# Altium PCB PCB9.PcbDoc
Units mil, origin at the board's own origin, x right, y up, seen from the top; angles counter-clockwise.
Board outline 6000 x 4000 mil, 2 copper layers (Top Layer, Bottom Layer); 11 components, 11 nets, 67 pads, 0 vias.
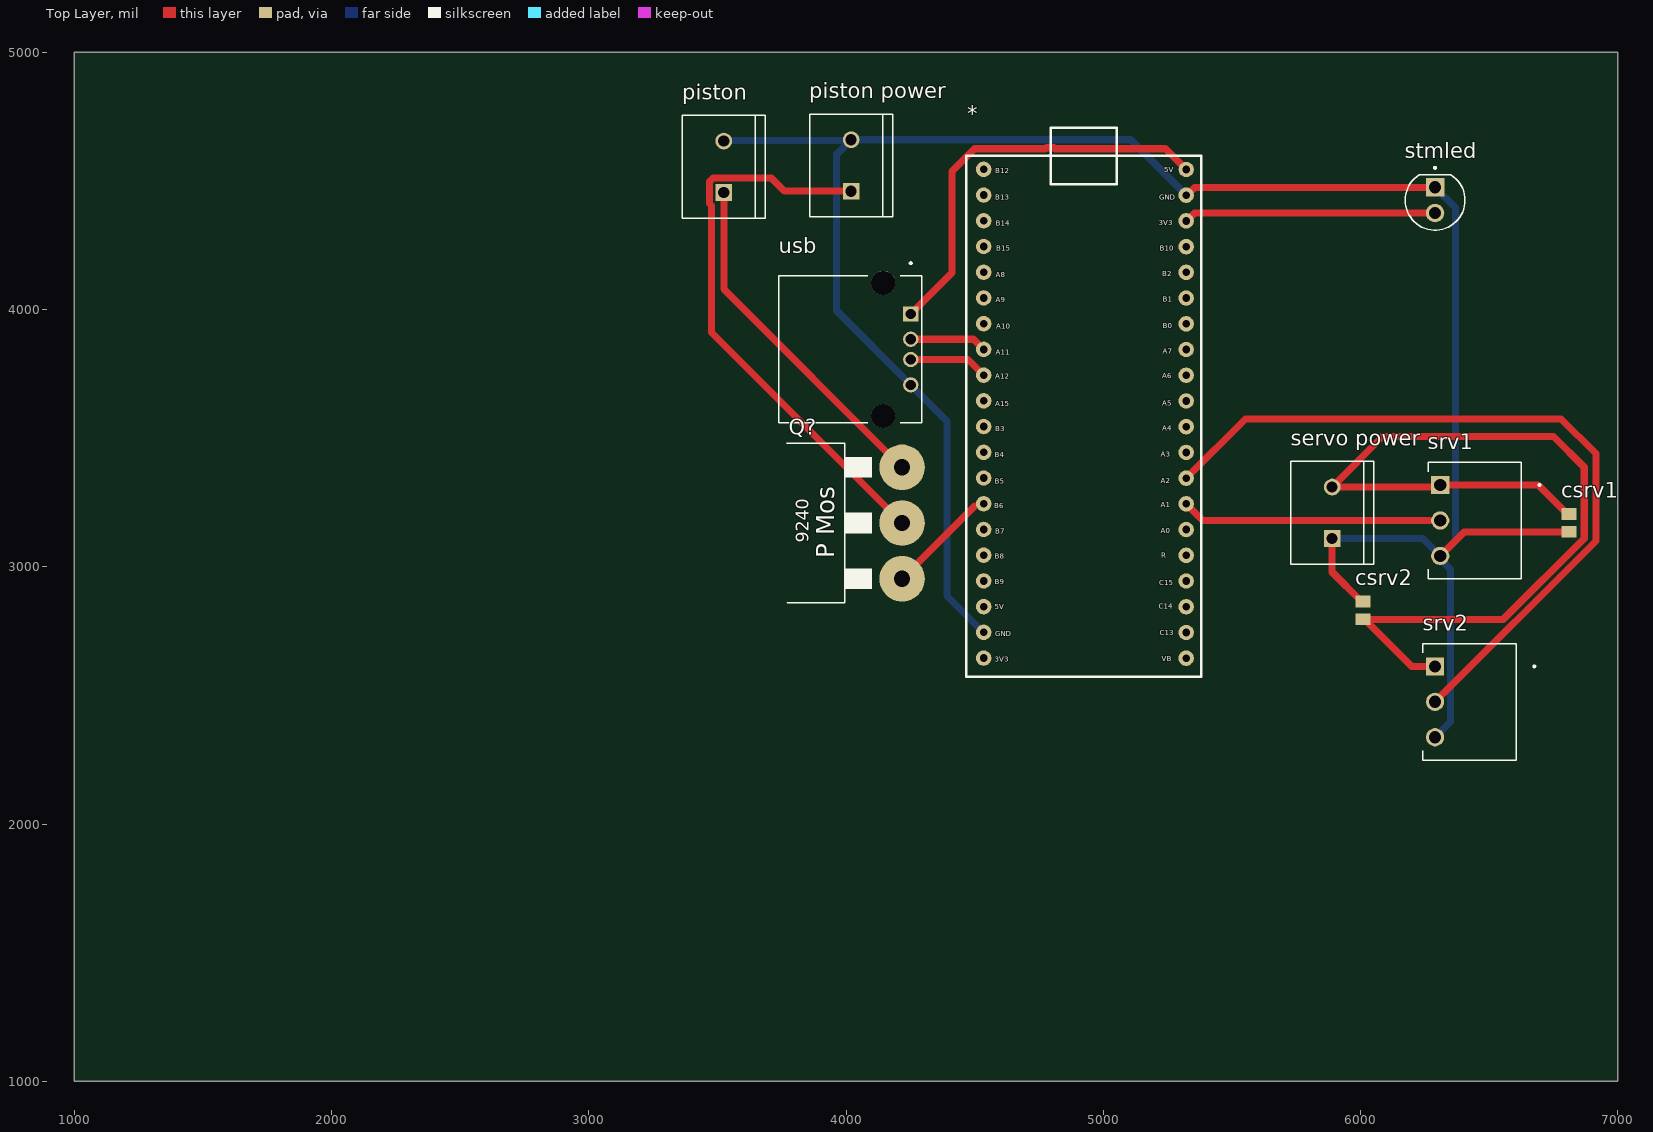
[diagram p0: Top Layer view]
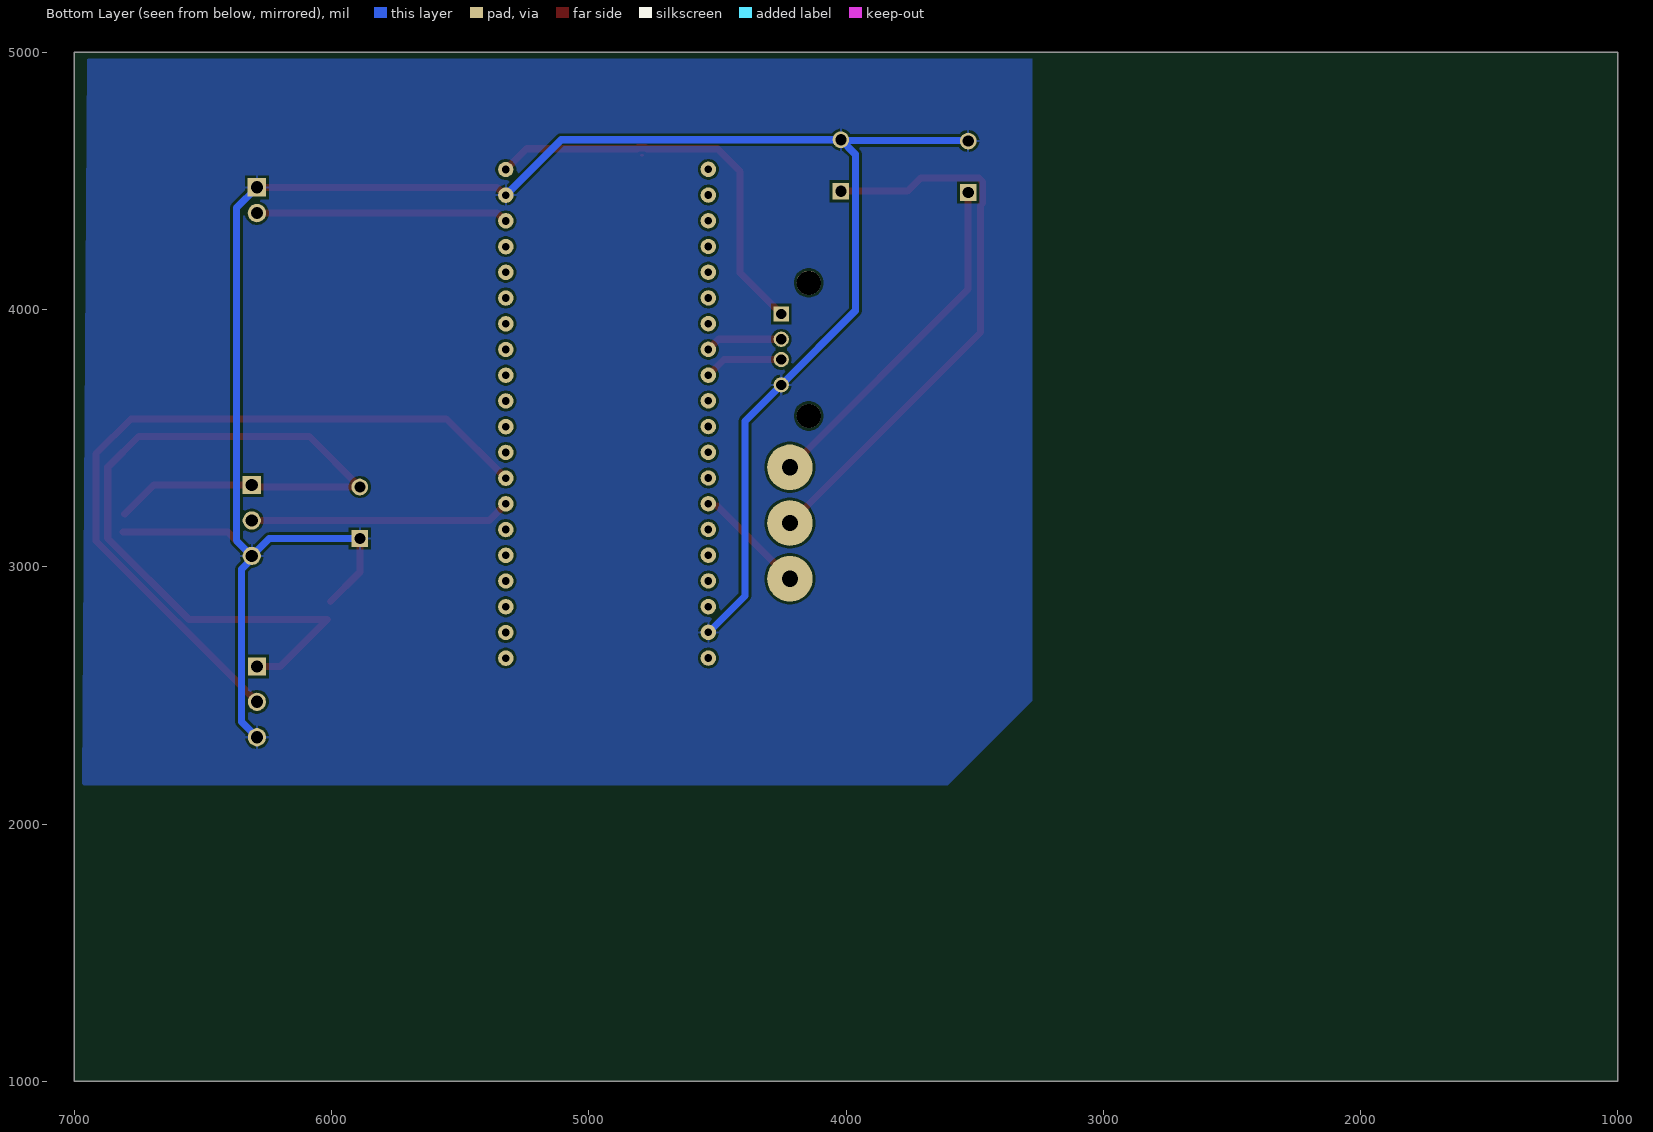
[diagram p1: Bottom Layer view, seen from below]
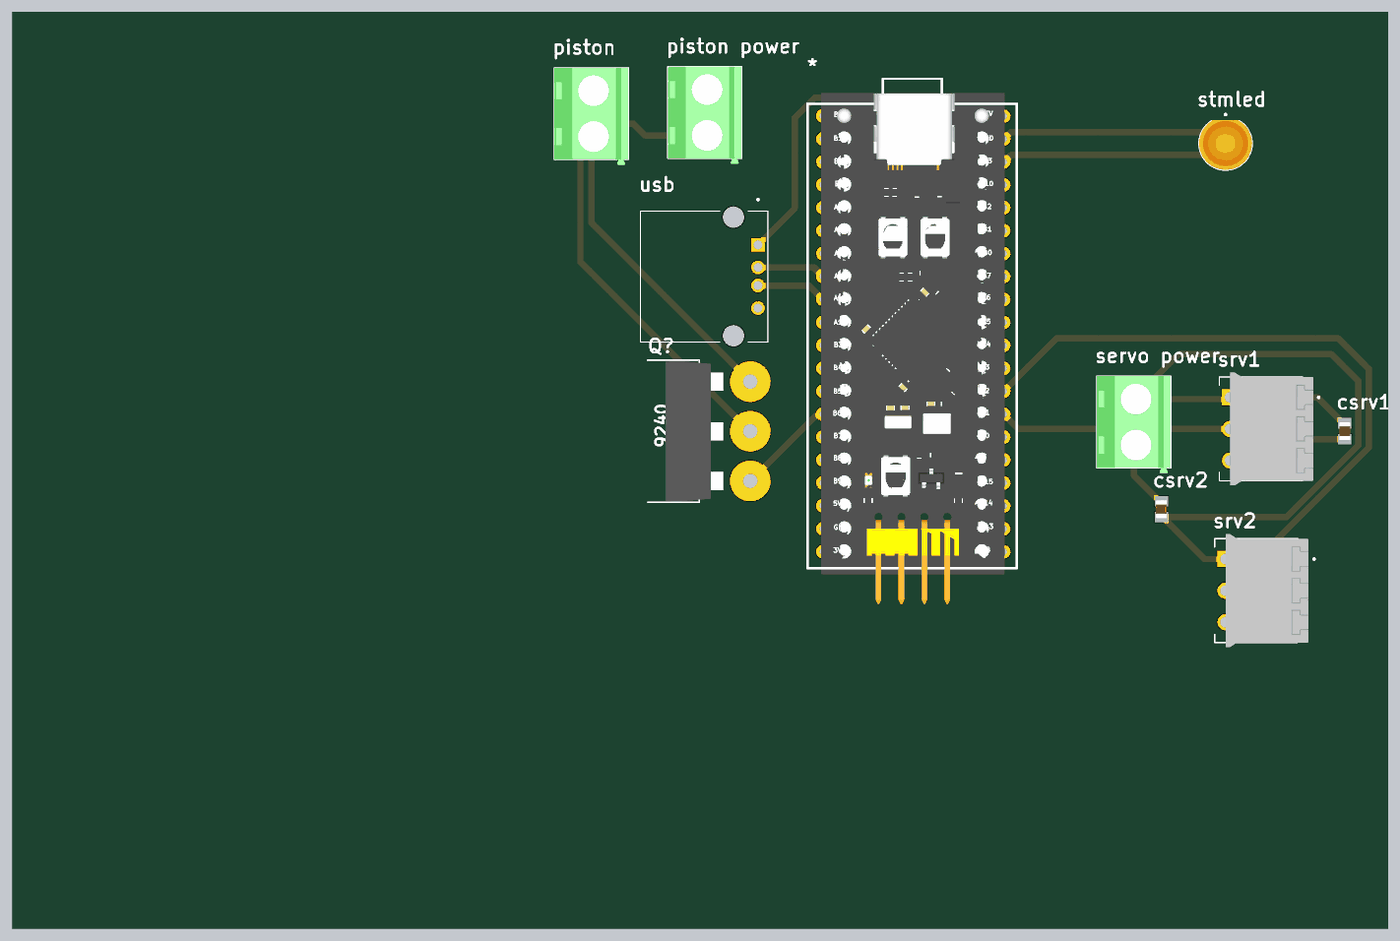
[diagram p2: 3D render of the assembled board from above, using the file's embedded part models]

## Layer stack, top to bottom
Top Solder: solder mask 0.4, Solder Resist, Dk 3.5
Top Layer: signal copper 1.4
Dielectric 1: dielectric 12.6, FR-4, Dk 4.8
Bottom Layer: signal copper 1.4
Bottom Solder: solder mask 0.4, Solder Resist, Dk 3.5

## Board outline
1000,1000 7000,1000 7000,5000 1000,5000

## Design rules (kind name [scope] priority, off if disabled: settings)
Clearance [All] p1: gap=10 ignorepadtopadclearanceinfootprint=FALSE
PolygonConnect [All] p1: connectstyle=Relief reliefconductorwidth=10 reliefentries=4 polygonreliefangle="90 Angle" airgapwidth=10
RoutingVias [All] p1: holewidth=28 width=50 viastyle="Through Hole" minholewidth=28 minwidth=50 maxholewidth=28 maxwidth=50
SolderMaskExpansion [All] p1: expansion=4 istentingtop=FALSE
SupplyNets "Schematic Supply Nets" [InNet('GND')] p1: voltage=0.000
Width [All] p1: maxlimit=393.7 minlimit=10 preferedwidth=27.56
30 further rules are at their usual default settings.

## Components (designator, comment, footprint, x,y, rotation, side; value= is the part's Value field where it differs from the comment)
* "STM32 BLACK PILL" "STM 32 Black Pill" 4535.28,4544.38 r0 top
csrv1 "CGA4J1X7S1E106K125AE" CAPC2012X150N 6810,3170.35 r270 top
csrv2 "CGA4J1X7S1E106K125AE" CAPC2012X150N 6010,2830.35 r90 top
piston "282837-2" TE_282837-2 3525,4555 r90 top
"piston power" "282837-2" TE_282837-2 4020,4560 r90 top
Q? "IRFP9240" TO-247_XA.AMP.P 3955,3170 r90 top
"servo power" "282837-2" TE_282837-2 5890,3210 r90 top
srv1 "284512-3" TE_284512-3 6310,3180 r270 top
srv2 "284512-3" TE_284512-3 6290,2475 r270 top
stmled "L08R5000Q1" LEDRD254W57D500H1070 6290,4425 r270 top
usb "USB-A1HSW6" OST_USB-A1HSW6 4145,3845 r270 top

## Footprints (in the part's own frame and the unit in brackets; to place one, negate y for a bottom-side part, rotate by r counter-clockwise, add the part's x,y. Pads: shape width x height; smd on the part's side, far side on the other; paste and mask are expansions set on the pad)
CAPC2012X150N [mm]
  rect 1.15x1.47 smd: 1(-0.88,0) 2(0.88,0)
  body extent -1,-0.63 1,0.63, height 1.5
LEDRD254W57D500H1070 [mm]
  round 1.815 hole 1.21: A(1.27,0)
  rect 1.815x1.815 / inner round 1.815 / far side rect 1.815x1.815 hole 1.21: C(-1.27,0)
  silkscreen extent -3.3,-2.96 2.96,2.96, body extent -2.6,-2.95 2.95,2.95, height 9.1
OST_USB-A1HSW6 [mm]
  rect 1.508x1.508 / inner round 1.508 / far side rect 1.508x1.508 hole 1: 1(-3.5,2.71)
  round 1.508 hole 1: 2(-1,2.71) 3(1,2.71) 4(3.5,2.71)
  round 2.38 hole 2.38 unplated: ""(-6.57,0) ""(6.57,0)
  silkscreen extent -8.61,-10.3 7.25,3.8
"STM 32 Black Pill" [mil]
  round 60 hole 30: 1(787.4,0) 2(787.2,-99.8) 3(787.2,-199.8) 4(787.2,-299.8) 5(787.2,-399.8) 6(787.2,-499.8) 7(787.2,-599.8) 8(787.2,-699.8) 9(787.2,-799.8) 10(787.2,-899.8) 11(787.2,-999.8) 12(787.2,-1099.8) 13(787.2,-1199.8) 14(787.2,-1299.8) 15(787.2,-1399.8) 16(787.2,-1499.8) 17(787.2,-1599.8) 18(787.2,-1699.8) 19(787.2,-1799.8) 20(787.2,-1899.8) 21(-0.28,0.62) 22(-0.28,-99.38) 23(-0.28,-199.38) 24(-0.28,-299.38) 25(-0.28,-399.38) 26(-0.28,-499.38) 27(-0.28,-599.38) 28(-0.28,-699.38) 29(-0.28,-799.38) 30(-0.28,-899.38) 31(-0.28,-999.38) 32(-0.28,-1099.38) 33(-0.28,-1199.38) 34(-0.28,-1299.38) 35(-0.28,-1399.38) 36(-0.28,-1499.38) 37(-0.28,-1599.38) 38(-0.28,-1699.38) 39(-0.28,-1799.38) 40(-0.28,-1899.38)
  Top Layer lines w10: 255.44,55.62 261.44,55.62
  silkscreen extent -68,-1971 845,163, body extent -8,-2128 792,102, height 124
TE_282837-2 [mm]
  rect 1.65x1.65 / inner round 1.65 / far side rect 1.65x1.65 hole 1.1: 1(-2.54,0)
  round 1.65 hole 1.1: 2(2.54,0)
  silkscreen extent -5.08,-4.1 5.08,4.1, body extent -5.68,-4.1 5.08,4.1, height 10
TE_284512-3 [mm]
  rect 1.8x1.8 / inner round 1.8 / far side rect 1.8x1.8 hole 1.2: 1(-3.5,0)
  round 1.8 hole 1.2: 2(0,0) 3(3.5,0)
  silkscreen extent -5.75,-1.2 5.75,9.9, body extent -6.25,0 6.25,9.2, height 4.25
TO-247_XA.AMP.P [mm]
  round 4.5 hole 1.6: D(0,-6.68) G(-5.5,-6.68) S(5.5,-6.68)
  silkscreen extent -7.87,-3.68 7.87,4.68, body extent -7.8,-2.3 7.8,2.7, height 35.1

## Part data
*: library part CMP-004-000000-1, Design Item ID="STM32 BLACK PILL", Source="STM 32 Balck Pill.SchLib"
csrv1 csrv2: "10 ÂµF Â±10% 25V Ceramic Capacitor X7S 0805 (2012 Metric)", Package="2012 TDK", Check_prices=https://www.snapeda.com/parts/CGA4J1X7S1E106K125AE/TDK/view-part/?ref=eda, Digi-Key_Part_Number=445-181411-2-ND, MF=TDK, MP=CGA4J1X7S1E106K125AE, Purchase-URL=https://pricing.snapeda.com/search/part/CGA4J1X7S1E106K125AE/?ref=eda, SnapEDA_Link=https://www.snapeda.com/parts/CGA4J1X7S1E106K125AE/TDK/view-part/?ref=snap
piston "piston power" "servo power": "Ð Ð°Ð·ÑŠÐµÐ¼Ð½Ñ‹Ðµ ÐºÐ»ÐµÐ¼Ð¼Ð½Ñ‹Ðµ ÐºÐ¾Ð»Ð¾Ð´ÐºÐ¸ Ð Ð¾Ð·ÐµÑ‚ÐºÐ° 2 Ð¿Ð¾Ð»Ð¾Ð¶ÐµÐ½Ð¸Ñ 5,08 Ð¼Ð¼ ÐŸÑ€Ð¸Ð¿Ð¾Ð¹ Ð¿Ñ€ÑÐ¼Ð¾Ð¹ Ñ‡ÐµÑ€ÐµÐ· Ð¾Ñ‚Ð²ÐµÑ€ÑÑ‚Ð¸Ðµ 13,5 Ð / ÐºÐ¾Ð½Ñ‚Ð°ÐºÑ‚", Package=None, Availability="In Stock", Check_prices=https://www.snapeda.com/parts/282837-2/TE+Connectivity+AMP+Connectors/view-part/?ref=eda, MF="TE Connectivity", MP=282837-2, Price=None, Purchase-URL=https://pricing.snapeda.com/search/part/282837-2/?ref=eda, SnapEDA_Link=https://www.snapeda.com/parts/282837-2/TE+Connectivity+AMP+Connectors/view-part/?ref=snap
Q?: "P-Channel 200 V 12A (Tc) 150W (Tc) Ø¹Ø¨Ø± Ø§Ù„ÙØªØ­Ø© TO-247AC", Package="TO-247 Vishay Siliconix", Availability="In Stock", Check_prices=https://www.snapeda.com/parts/IRFP9240/Vishay+Siliconix/view-part/?ref=eda, MF="Vishay Siliconix", MP=IRFP9240, Price=None, Purchase-URL=https://pricing.snapeda.com/search/part/IRFP9240/?ref=eda, SnapEDA_Link=https://www.snapeda.com/parts/IRFP9240/Vishay+Siliconix/view-part/?ref=snap
srv1 srv2: "3 Position Terminal Block Header, Male Pins, Shrouded (4 Side) 0.138 (3.50mm) 90Â°, Right Angle Through Hole", Package=None, Centerline_Pitch="3.5 mm[.138 in]", Check_prices=https://www.snapeda.com/parts/284512-3/TE+Connectivity+AMP+Connectors/view-part/?ref=eda, EU_RoHS_Compliance=Compliant, MF="TE Connectivity", MP=284512-3, Number_of_Positions=3, SnapEDA_Link=https://www.snapeda.com/parts/284512-3/TE+Connectivity+AMP+Connectors/view-part/?ref=snap
stmled: "LED, 5MM, ORANGE; LED / Lamp Size: 5mm / T-1 3/4; LED Colour: Orange; Typ Luminous Intensity: 4.3mcd; Viewing Angle: ...", Package=None, Availability="In Stock", Check_prices=https://www.snapeda.com/parts/L08R5000Q1/LED+Technology/view-part/?ref=eda, MF="LED Technology", MP=L08R5000Q1, Price=None, SnapEDA_Link=https://www.snapeda.com/parts/L08R5000Q1/LED+Technology/view-part/?ref=snap
usb: Package=None, Availability=Unavailable, MF="{'manufacturer': u'On Shore Technology Inc.'}", MP=USB-A1HSW6, Price=None

## Nets (pads, with @x,y where several pads share a name; then routed paths per layer and width w, separated by ;. In a path a pad name is that pad's centre, name@x,y a point inside that pad or via, vN(x,y) a via of type N, cw(c..) or ccw(c..) an arc to the next point about the centre after c; other vN are vias at no path point)
GND: "piston power.2" "servo power.1" *.2 *.39 csrv1.2 csrv2.2 piston.2 srv1.3 srv2.3 stmled.C usb.4 | length 8564.9
  Top Layer w10: csrv2.2@6003.7,2865 csrv2.2
  Top Layer w27.56: *.2 5325.28,4444.57 5355.7,4475 stmled.C ; 5890,3110 5890,2978.7 csrv2.2@6003.7,2865 ; srv1.3 6403.5,3135.71 csrv1.2
  Bottom Layer w27.56: piston.2 3527.5,4657.5 4017.5,4657.5 4020,4660 ; *.39 4393.29,2886.71 4393.29,3565.61 usb.4 3963.74,3995.16 3963.74,4603.74 4020,4660 ; *.2 5107.06,4660 4020,4660 ; 5890,3110 6242.2,3110 srv1.3 ; srv2.3 6349.21,2396.42 6349.21,2991.27 6310,3030.49 srv1.3 ; stmled.C 6369.21,4395.79 6369.21,3101.42 srv1.3
Net*_1: *.1 usb.1 | length 1604.3
  Top Layer w27.56: usb.1 4411.37,4142.47 4411.37,4536.37 4500,4625 4775.02,4625 4778.8,4628.78 4808.65,4628.78 4812.42,4625 5242.06,4625 *.1
Net*_3: *.3 stmled.A | length 980.1
  Top Layer w27.56: *.3 5325.28,4344.57 5355.7,4375 stmled.A
Net*_13: *.13 srv2.2 | length 2967.8
  Top Layer w27.56: *.13 5552.91,3575 6780,3575 6915,3440 6915,3100 srv2.2
Net*_14: *.14 srv1.2 | length 1014.3
  Top Layer w27.56: *.14 5387.06,3180 srv1.2
Net*_34: *.34 Q?.G | length 437.8
  Top Layer w10: 4499.96,3235.43 4525.43,3235.43 *.34
  Top Layer w27.56: Q?.G 4499.96,3235.43
Netcsrv1_1: "servo power.2" csrv1.1 csrv2.1 srv1.1 srv2.1 | length 3696.8
  Top Layer w10: csrv2.1 csrv2.1@6016.3,2795.71 ; srv1.1@6302.2,3310 srv1.1 ; csrv1.1@6803.7,3205 csrv1.1
  Top Layer w27.56: srv2.1 6199.21,2612.8 6016.3,2795.71 6555.2,2795.71 6870,3110.5 6870,3386.73 6750.51,3506.22 6086.22,3506.22 5890,3310 srv1.1@6302.2,3310 ; srv1.1 6690.91,3317.8 csrv1.1@6803.7,3205
"Netpiston power_1": "piston power.1" Q?.D | length 2237.4
  Top Layer w10: 3471.31,4499.9 3473.38,4497.84 3481.66,4497.84 3486.31,4502.48
  Top Layer w27.56: 3471.31,4499.9 3468.74,4497.33 ; 4020,4460 3760.65,4460 3709.39,4511.26 3482.67,4511.26 3468.74,4497.33 ; Q?.D 3477.52,3910.47 3477.52,4403.89 3468.74,4412.67 3468.74,4497.33
Netpiston_1: piston.1 Q?.S | length 1355.5
  Top Layer w27.56: piston.1 3525,4079.53 Q?.S
USB_D+: *.29 usb.3 | length 308.4
  Top Layer w27.56: usb.3 4474.37,3805.63 *.29
USB_D-: *.28 usb.2 | length 299.6
  Top Layer w27.56: usb.2 4495.63,3884.37 *.28
pads on no net: *.4 *.5 *.6 *.7 *.8 *.9 *.10 *.11 *.12 *.15 *.16 *.17 *.18 *.19 *.20 *.21 *.22 *.23 *.24 *.25 *.26 *.27 *.30 *.31 *.32 *.33 *.35 *.36 *.37 *.38 *.40 usb.

## Polygon pours and split planes (outlines as drawn)
GND on Bottom Layer "GND_L02_P000" (solid, pour order 0): 6950,4980 6945,4975 3275,4975 3275,2480 3605,2150 6970,2150

## Text inside footprints (layer, text, board x,y; h text height)
*: Top Overlay "3V3" at 4579,2630 h20; Top Overlay "GND" at 4580,2730 h20; Top Overlay "B8" at 4578,3032 h20; Top Overlay "B7" at 4580,3129 h20; Top Overlay "B6" at 4576,3228 h20; Top Overlay "B4" at 4579,3426 h20; Top Overlay "B5" at 4578,3323 h20; Top Overlay "5V" at 4578,2834 h20; Top Overlay "B9" at 4578,2932 h20; Top Overlay "A12" at 4581,3730 h20; Top Overlay "A11" at 4583,3825 h20; Top Overlay "B3" at 4581,3526 h20; Top Overlay "A10" at 4584,3925 h20; Top Overlay "A9" at 4583,4028 h20; Top Overlay "A8" at 4582,4126 h20; Top Overlay "B15" at 4585,4228 h20; Top Overlay "A15" at 4581,3624 h20; Top Overlay "B14" at 4582,4326 h20; Top Overlay "B13" at 4580,4426 h20; Top Overlay "B12" at 4581,4530 h20; Top Overlay "5V" at 5238.04,4533.55 h20; Top Overlay "B0" at 5231.97,3927.57 h20; Top Overlay "B2" at 5229.97,4128.57 h20; Top Overlay "B1" at 5230.97,4030.57 h20; Top Overlay "A6" at 5228.97,3732.57 h20; Top Overlay "A4" at 5228.97,3528.57 h20; Top Overlay "A5" at 5228.97,3626.57 h20; Top Overlay "A7" at 5230.97,3827.57 h20; Top Overlay "VB" at 5226.97,2632.57 h20; Top Overlay "R" at 5225.97,3034.57 h20; Top Overlay "A2" at 5222.97,3325.57 h20; Top Overlay "A3" at 5223.97,3428.57 h20; Top Overlay "A0" at 5223.97,3129.57 h20; Top Overlay "A1" at 5223.97,3230.57 h20; Top Overlay "C14" at 5215.97,2836.57 h20; Top Overlay "C15" at 5216.97,2928.57 h20; Top Overlay "C13" at 5218.97,2733.57 h20; Top Overlay "B10" at 5218.97,4228.57 h20; Top Overlay "3V3" at 5215.97,4327.57 h20; Top Overlay "GND" at 5216.97,4426.57 h20
Q?: Top Overlay "P Mos" at 3955,3032.2 h70 r90; Top Overlay "9240" at 3855,3093.23 h50 r90